# Altium PCB CAR_BOARD_2024-07-15.pcbdoc (part 2 of 2)
Units mil, origin at the board's own origin, x right, y up, seen from the top; angles counter-clockwise.
Board outline 4100 x 4517.05 mil, 2 copper layers (Top Layer, Bottom Layer); 71 components, 75 nets, 312 pads, 373 vias.
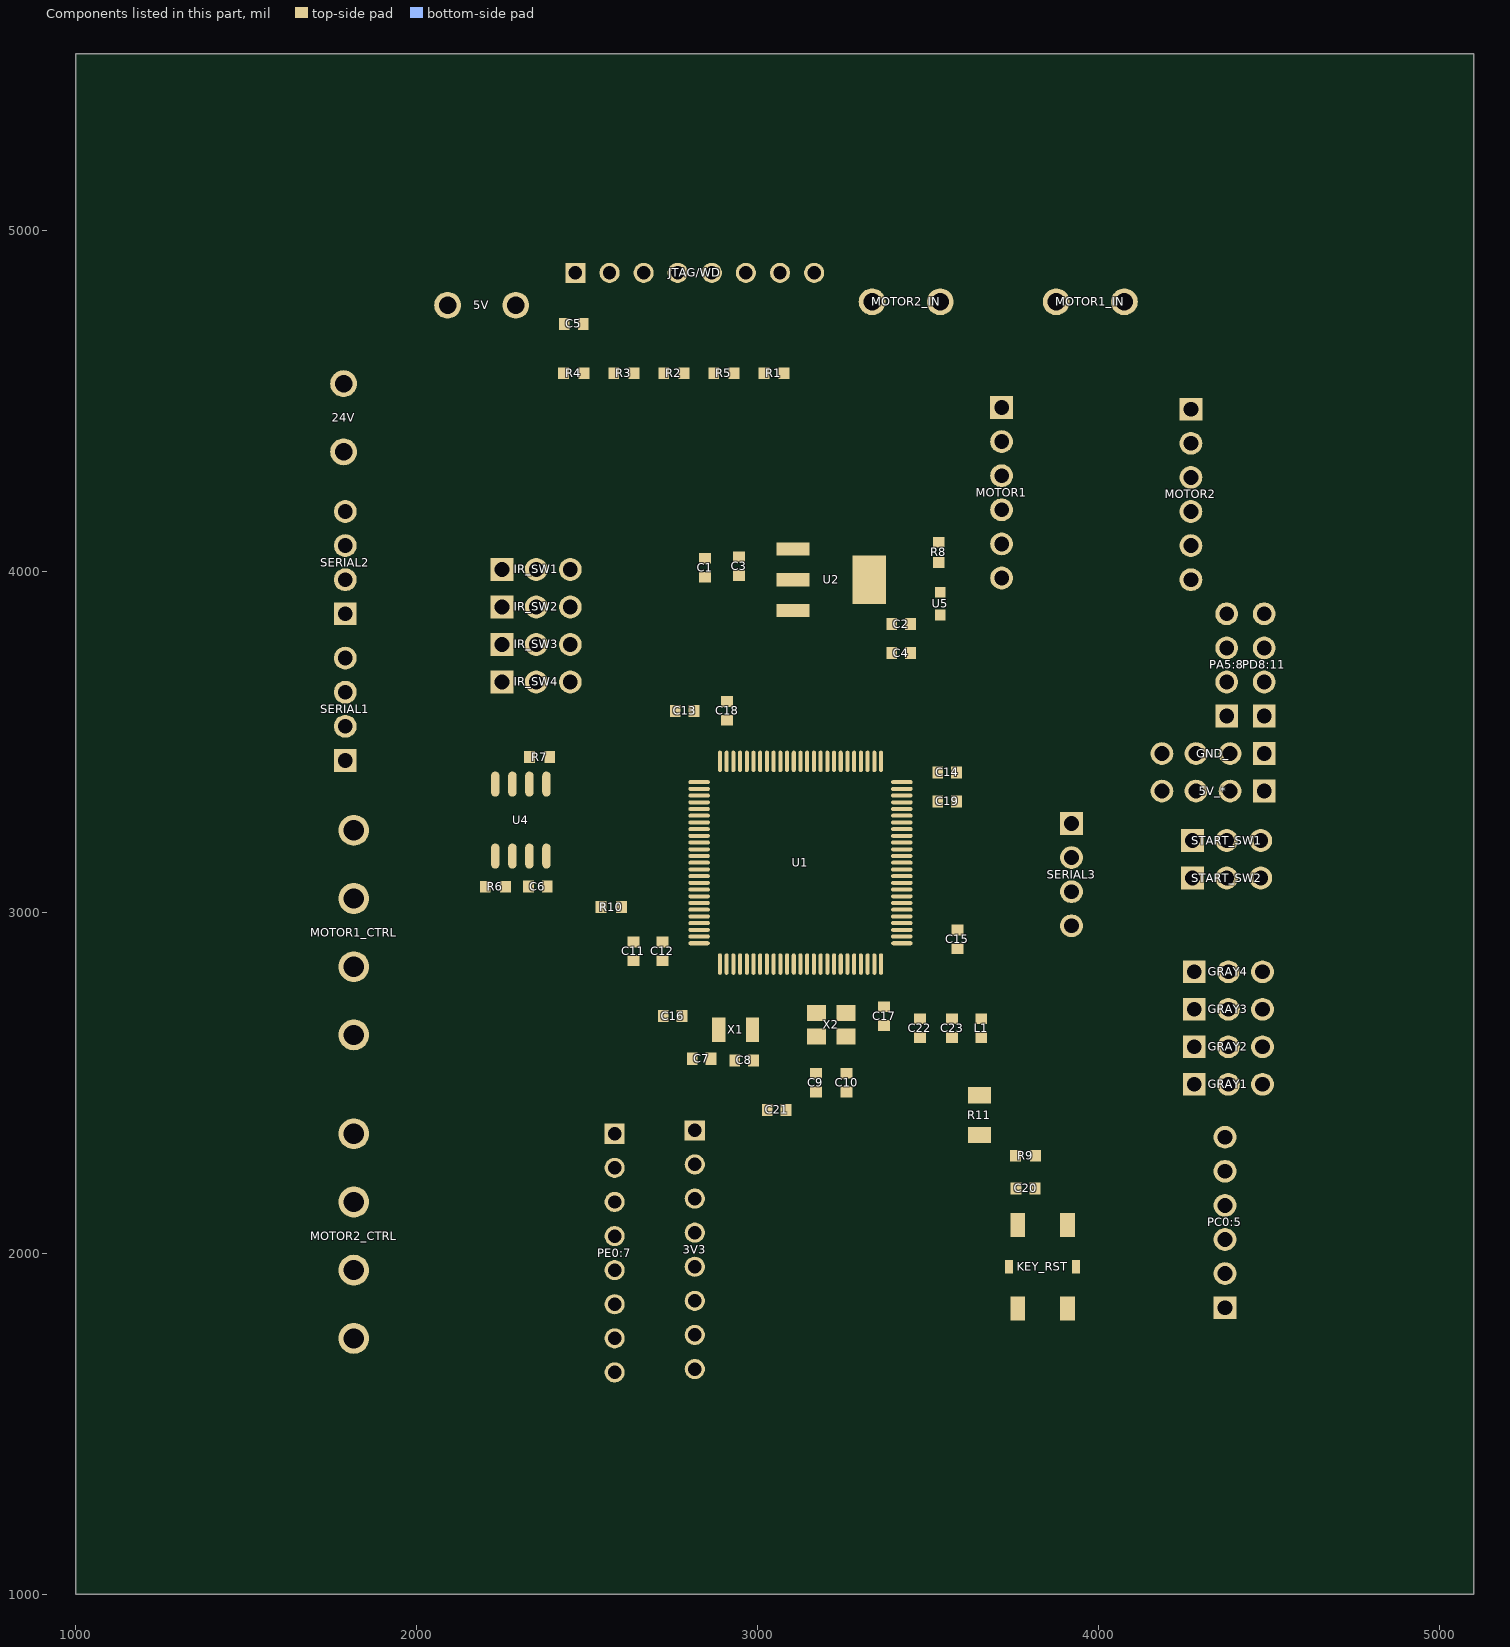
[diagram p2: the components of this part, seen from the top]

## Other copper
Top Layer:
  region net SPI1_MOSI: 2392.4,3367.62 2392.4,3358.87 2397.65,3355.52 2397.65,3360.47
  region net U4_6: 2334.48,3411.49 2325.73,3411.57 2328.4,3416.79 2331.9,3416.76
  region net VCC: 2292.4,3351.3 2267.6,3351.3 2275,3336.3 2285,3336.3
  region net VCC: 2241.69,3347.17 2218.31,3355.44 2220,3338.93 2230,3335.39
  region net VCC: 2342.4,3188.7 2317.6,3188.7 2325,3203.7 2335,3203.7
  region net VCC: 2342.21,3137.93 2317.79,3142.23 2322.4,3126.19 2332.4,3124.43
  region net PB4/TRST: 2284.38,3200.31 2275.62,3200.31 2278.25,3205.56 2281.75,3205.56
  region net FLASH_CS: 2242.4,3140.08 2217.6,3140.08 2225,3125.08 2235,3125.08
  region net PE2: 2882.87,2837.44 2882.87,2846.19 2877.62,2839.04 2877.62,2834.09
  region net PE3: 2912.86,2877.3 2904.11,2877.34 2906.75,2881.25 2910.25,2881.24
  region net PE4: 2932.5,2877.34 2923.75,2877.3 2926.35,2882.56 2929.85,2882.58
  region net PE5: 2952.19,2877.34 2943.44,2877.3 2946.05,2882.56 2949.55,2882.58
  region net PE6: 2973.17,2875.08 2965.25,2878.81 2969.77,2882.48 2973.13,2880.9
  region net VCC: 2993.11,2822.17 2981.3,2822.17 2982.2,2807.74 2992.2,2807.74
  region net OSC32_N: 3030.96,2818.22 3022.21,2818.19 3024.85,2812.95 3028.35,2812.96
  region net OSC32_P: 3050.65,2818.22 3041.9,2818.19 3044.55,2812.95 3048.05,2812.96
  region net VCC: 3091.54,2822.16 3079.72,2822.18 3080.6,2807.18 3090.6,2807.16
  region net OSC_N: 3110.97,2820.43 3103.04,2816.73 3107.54,2813.03 3110.91,2814.61
  region net OSC_P: 3130.65,2820.44 3122.72,2816.72 3127.23,2813.04 3130.6,2814.62
  region net RST: 3149.07,2877.32 3140.32,2877.32 3142.95,2882.57 3146.45,2882.57
  region net RST: 3150.34,2820.45 3142.43,2816.72 3146.94,2813.04 3150.31,2814.63
  region net PC0: 3168.76,2877.31 3160.01,2877.33 3162.65,2882.58 3166.15,2882.56
  region net PC1: 3188.82,2876.85 3180.11,2877.75 3183.25,2882.7 3186.75,2882.34
  region net PC2: 3208.1,2877.34 3199.35,2877.3 3201.95,2882.56 3205.45,2882.58
  region net PC3: 3227.79,2877.33 3219.04,2877.31 3221.65,2882.56 3225.15,2882.58
  region net VCC: 3249.02,2822.17 3237.2,2822.18 3238.1,2807.85 3248.1,2807.84
  region net GNDA: 3268.7,2873.35 3256.89,2873.35 3257.8,2888.35 3267.8,2888.35
  region net VDDA: 3288.39,2860.24 3288.39,2835.24 3302.2,2842.74 3302.2,2852.74
  region net VDDA: 3296.26,2835.24 3296.26,2860.24 3282.5,2852.74 3282.5,2842.74
  region net VDDA: 3308.07,2873.34 3296.26,2873.37 3297.2,2887.86 3307.2,2887.83
  region net GRAY1: 3345.9,2818.19 3337.15,2818.22 3339.75,2812.96 3343.25,2812.95
  region net GRAY2: 3367.13,2846.29 3367.13,2837.54 3372.38,2834.19 3372.38,2839.14
  region net GRAY3: 3432.54,2902.88 3423.79,2902.88 3430.94,2897.63 3435.89,2897.63
  region net VCC: 3448.07,2954.05 3447.59,2942.25 3462.62,2942.54 3463.02,2952.54
  region net GRAY4: 3451.8,2963.46 3451.79,2972.21 3457.05,2969.59 3457.05,2966.09
  region net PA5: 3451.81,2983.16 3451.79,2991.91 3457.05,2989.29 3457.05,2985.79
  region net PA6: 3451.82,3002.85 3451.78,3011.6 3457.04,3008.99 3457.06,3005.49
  region net PA7: 3451.82,3031.25 3451.77,3022.5 3457.04,3025.09 3457.06,3028.59
  region net PC4: 3451.81,3050.93 3451.78,3042.18 3457.04,3044.79 3457.05,3048.29
  region net PC5: 3451.81,3070.63 3451.79,3061.88 3457.05,3064.49 3457.05,3067.99
  region net FLASH_CS: 3392.81,3081.46 3392.56,3090.2 3387.39,3087.43 3387.49,3083.93
  region net PE7: 3392.7,3149.4 3392.67,3140.65 3387.43,3143.29 3387.44,3146.79
  region net MOTOR1_PWM: 3393.01,3189.03 3392.38,3180.3 3387.33,3183.29 3387.59,3186.79
  region net MOTOR2_PWM: 3393.34,3218.85 3392.11,3227.52 3387.28,3224.19 3387.78,3220.69
  region net OPI_TX: 3451.81,3326.53 3451.78,3317.78 3457.04,3320.39 3457.05,3323.89
  region net OPI_RX: 3451.8,3337.48 3451.79,3346.23 3457.05,3343.59 3457.05,3340.09
  region net U1_49: 3447.83,3355.64 3447.83,3367.45 3462.83,3366.54 3462.83,3356.54
  region net VCC: 3447.84,3375.32 3447.82,3387.13 3462.82,3386.24 3462.84,3376.24
  region net START_SW1: 3367.13,3452.54 3367.13,3443.79 3372.38,3450.94 3372.38,3455.89
  region net START_SW2: 3345.9,3471.82 3337.15,3471.78 3339.75,3477.04 3343.25,3477.06
  region net PD8: 3286.86,3471.79 3278.11,3471.81 3280.75,3477.05 3284.25,3477.05
  region net PD9: 3267.17,3471.8 3258.42,3471.8 3261.05,3477.05 3264.55,3477.05
  region net PD10: 3247.48,3471.8 3238.73,3471.8 3241.35,3477.05 3244.85,3477.05
  region net PD11: 3227.79,3471.81 3219.04,3471.79 3221.65,3477.04 3225.15,3477.06
  region net M2_ENCODER_A: 3208.62,3471.16 3199.95,3472.36 3203.25,3477.2 3206.75,3476.72
  region net M2_ENCODER_B: 3188.45,3471.78 3179.7,3471.82 3182.35,3477.06 3185.85,3477.04
  region net M1_ENCODER_A: 3129.38,3471.8 3120.62,3471.8 3123.25,3477.05 3126.75,3477.05
  region net M1_ENCODER_B: 3109.69,3471.81 3100.94,3471.79 3103.55,3477.05 3107.05,3477.05
  region net PA8: 3052.02,3469.13 3044.41,3473.44 3049.23,3476.75 3052.39,3474.96
  region net IR_SW1: 3030.96,3471.79 3022.21,3471.81 3024.85,3477.06 3028.35,3477.04
  region net IR_SW2: 3011.27,3471.8 3002.52,3471.8 3005.15,3477.05 3008.65,3477.05
  region net IR_SW3: 2991.58,3471.8 2982.83,3471.8 2985.45,3477.05 2988.95,3477.05
  region net IR_SW4: 2971.89,3471.81 2963.14,3471.79 2965.75,3477.05 2969.25,3477.05
  region net PA13/TMS: 2952.19,3471.82 2943.44,3471.78 2946.05,3477.04 2949.55,3477.06
  region net U1_73: 2934.05,3467.85 2922.24,3467.81 2923.1,3482.82 2933.1,3482.85
  region net VCC: 2882.87,3435.67 2882.87,3460.67 2867.87,3470.24 2867.87,3456.1
  region net PA14/TCK: 2798.21,3385.61 2798.19,3376.86 2792.95,3379.49 2792.96,3382.99
  region net PA15/TDI: 2798.2,3357.17 2798.2,3365.92 2792.95,3363.29 2792.95,3359.79
  region net TEST_TX: 2798.23,3306.88 2798.17,3298.13 2792.94,3300.79 2792.96,3304.29
  region net TEST_RX: 2798.21,3239.05 2798.2,3247.8 2792.95,3245.19 2792.95,3241.69
  region net TOF_TX: 2798.23,3188.78 2798.17,3180.03 2792.94,3182.69 2792.96,3186.19
  region net TOF_RX: 2798.22,3169.09 2798.18,3160.34 2792.94,3162.99 2792.96,3166.49
  region net PB3/TDO: 2798.32,3129.8 2798.09,3121.05 2792.91,3123.82 2793,3127.32
  region net PB4/TRST: 2798.27,3101.2 2798.13,3109.94 2792.92,3107.24 2792.98,3103.74
  region net SPI1_MOSI: 2799.08,3090.98 2797.46,3082.38 2792.78,3085.89 2793.44,3089.39
  region net MOTOR1_DIR1: 2798.24,3070.67 2798.16,3061.92 2792.94,3064.59 2792.97,3068.09
  region net MOTOR1_DIR2: 2798.23,3050.98 2798.17,3042.23 2792.94,3044.89 2792.96,3048.39
  region net U1_94: 2799.16,3021.81 2797.4,3030.38 2792.78,3026.79 2793.5,3023.29
  region net MOTOR2_DIR1: 2798.22,3011.6 2798.18,3002.85 2792.94,3005.49 2792.96,3008.99
  region net MOTOR2_DIR2: 2798.21,2991.91 2798.19,2983.16 2792.95,2985.79 2792.95,2989.29
  region net PE0: 2798.21,2963.45 2798.2,2972.2 2792.95,2969.59 2792.95,2966.09
  region net PE1: 2798.21,2943.77 2798.2,2952.52 2792.95,2949.89 2792.95,2946.39
  region net VCC: 2834.42,2902.88 2809.42,2902.88 2799.82,2887.88 2813.97,2887.88
  region net VCC: 3319.57,4045.87 3375.23,4045.87 3406,4083.37 3370.65,4083.37
  region net VCC: 3277.99,3943.79 3277.99,4006.29 3240.49,3987.54 3240.49,3962.54
  region net VCC: 3375.23,3957.59 3375.23,3904.13 3383.56,3900.31 3392.4,3926.83
  region net +5V: 3054.77,3865.16 3063.15,3903.74 3030.88,3931.84 3024.57,3902.8
  region net VCC: 3152.01,3955.71 3152.01,3994.29 3189.51,3987.54 3189.51,3962.54
  region net FLASH_CS: 2200.95,3092.01 2216.22,3072.21 2221.75,3089.6 2215.58,3097.59
  region net VCC: 2275.53,3087.54 2275.53,3062.54 2290.53,3070.04 2290.53,3080.04
  region net PA14/TCK: 2918.38,4562.99 2914.3,4570.73 2911.97,4563.9 2913.68,4560.66
  region net PA14/TCK: 2925.83,4597.01 2934.58,4597.01 2931.95,4602.26 2928.45,4602.26
  region net PB4/TRST: 2477.95,4562.99 2473.78,4570.68 2471.48,4563.91 2473.23,4560.7
  region net PB4/TRST: 2502.49,4597.01 2505.53,4588.81 2508.37,4596.24 2507.03,4599.85
  region net PA15/TDI: 2630.62,4562.99 2639.38,4562.99 2636.75,4557.74 2633.25,4557.74
  region net PA15/TDI: 2649.22,4597.01 2652.37,4588.85 2655.15,4596.22 2653.77,4599.79
  region net PA13/TMS: 2767.46,4588.82 2770.54,4597.01 2765.99,4599.83 2764.64,4596.23
  region net PA13/TMS: 2785.62,4562.99 2794.38,4562.99 2791.75,4557.74 2788.25,4557.74
  region net PB3/TDO: 3065.17,4562.99 3061.13,4570.75 3058.78,4563.9 3060.48,4560.64
  region net PB3/TDO: 3081.38,4597.01 3072.63,4597.01 3075.25,4602.26 3078.75,4602.26
  region net VCC: 3376.69,3777.72 3408.19,3777.72 3404.9,3815.22 3379.9,3815.22
  region net VCC: 3408.19,3742.28 3376.69,3742.28 3377.5,3704.78 3402.5,3704.78
  region net +5V: 2962.71,4058.31 2962.71,4026.81 2982.4,4030.04 2982.4,4055.04
  region net VCC: 3376.69,3862.72 3408.19,3862.72 3404.9,3900.22 3379.9,3900.22
  region net VCC: 3408.19,3827.28 3376.69,3827.28 3379.9,3789.78 3404.9,3789.78
  region net +5V: 2827.29,4021.81 2827.29,4053.31 2817.4,4050.04 2817.4,4025.04
  region net +5V: 2862.71,4053.31 2862.71,4021.81 2900.21,4025.04 2900.21,4050.04
  region net U5_1: 3521.25,3954.25 3538.75,3954.25 3533.5,3964.75 3526.5,3964.75
  region net U5_1: 3521.25,4009.47 3538.75,4009.47 3533.5,3998.97 3526.5,3998.97
  region net VCC: 3512.99,4068.78 3512.99,4100.53 3475.49,4097.14 3475.49,4072.14
  region net U4_6: 2325.86,3437.99 2334.61,3437.99 2331.96,3432.74 2328.46,3432.74
  region net PB3/TDO: 2405.53,3446.27 2402.71,3437.99 2407.24,3435.02 2408.5,3438.71
  region net VCC: 2314.9,3092.72 2339.9,3092.72 2332.4,3107.72 2322.4,3107.72
  region net VCC: 2311.69,3062.54 2311.69,3087.54 2296.69,3080.04 2296.69,3070.04
  region net OSC_P: 3242.29,2542.28 3250.97,2543.31 3242.44,2547.58 3238.01,2547.06
  region net OSC_N: 3167.32,2543.31 3176.07,2543.31 3173.45,2548.56 3169.95,2548.56
  region net U1_94: 2615.53,3020.67 2615.53,3029.42 2620.78,3026.79 2620.78,3023.29
  region net RST: 3750.92,2267.99 3759.67,2267.99 3757.05,2262.74 3753.55,2262.74
  region net VCC: 3798.78,2302.01 3830.53,2302.01 3824.92,2332.01 3804.92,2332.01
  region net PD8: 4457.62,3541.53 4451.53,3547.82 4449.68,3542.19 4452.11,3539.68
  region net VDDA: 3637.99,2675.14 3637.99,2700.14 3622.99,2692.64 3622.99,2682.64
  region net VCC: 3672,2648.19 3672,2616.69 3702,2619.14 3702,2639.14
  region net RST: 3766.58,2046.61 3757.83,2046.61 3760.45,2041.36 3763.95,2041.36
  region net RST: 3753.03,2117.48 3761.78,2117.48 3759.15,2122.73 3755.65,2122.73
  region net RST: 3757.83,1873.39 3766.58,1873.39 3763.95,1878.64 3760.45,1878.64
  region net GNDA: 3552.29,2619.94 3552.29,2644.94 3537.29,2637.44 3537.29,2627.44
  region net GNDA: 3587.71,2629 3565.95,2616.69 3585.09,2610.28 3594.13,2615.39
  region net VDDA: 3587.71,2700.14 3587.71,2675.14 3602.71,2682.64 3602.71,2692.64
  region net VDDA: 3552.29,2675.04 3552.29,2700.04 3537.29,2692.54 3537.29,2682.54
  region net GNDA: 3492.71,2644.94 3492.71,2619.94 3507.71,2627.44 3507.71,2637.44
  region net VDDA: 3492.71,2700.04 3492.71,2675.04 3507.71,2682.54 3507.71,2692.54
  region net VCC: 3073.1,2437.72 3098.1,2437.72 3090.6,2452.72 3080.6,2452.72
  region net VCC: 3098.31,2402.28 3066.81,2402.28 3075,2372.28 3095,2372.28
  region net RST: 3761.78,2172.28 3753.03,2172.28 3755.65,2167.03 3759.15,2167.03
  region net RST: 3750.92,2207.72 3759.67,2207.72 3757.05,2212.97 3753.55,2212.97
  region net U1_49: 3511.69,3330.89 3533.72,3342.72 3514.3,3349.31 3505.1,3344.37
  region net U1_73: 2927.71,3558.99 2905.95,3546.69 2923.58,3541.79 2931.64,3547.88
  region net VCC: 3387.71,2738.31 3387.71,2717.54 3402.71,2725.04 3402.71,2735.04
  region net VCC: 3352.29,2726.25 3374.19,2738.31 3354.9,2744.81 3345.78,2739.79
  region net VCC: 2793.31,2707.54 2793.31,2682.54 2800,2690.04 2800,2700.04
  region net VCC: 2793.31,2677.28 2761.81,2677.28 2765.1,2672.54 2790.1,2672.54
  region net VCC: 3567.29,2935.04 3567.29,2960.04 3552.29,2952.54 3552.29,2942.54
  region net VCC: 3568.76,2963.31 3602.71,2931.81 3615.22,2961.13 3600.55,2974.74
  region net VCC: 3527.66,3392.28 3511.69,3411.52 3506.26,3394.58 3512.68,3386.85
  region net VCC: 3511.69,3427.72 3543.19,3427.72 3537.5,3455.04 3512.5,3455.04
  region net VCC: 2822.5,3572.28 2797.5,3572.28 2805,3557.28 2815,3557.28
  region net VCC: 2737.71,2869.94 2737.71,2844.94 2752.71,2852.44 2752.71,2862.44
  region net VCC: 2702.29,2844.94 2702.29,2869.94 2687.29,2862.44 2687.29,2852.44
  region net VCC: 2617.29,2841.69 2617.29,2873.19 2587.29,2867.44 2587.29,2847.44
  region net VCC: 2652.71,2869.94 2652.71,2844.94 2667.71,2852.44 2667.71,2862.44
  region net VCC: 2840,2330.47 2790,2330.47 2805,2300.47 2825,2300.47
  region net VCC: 2785.47,2345.44 2829.77,2389.53 2789.93,2402.79 2772.22,2385.15
  region net GNDA: 3683.49,2439.45 3661.29,2439.45 3681.72,2424.45 3695.86,2424.45
  region net GNDA: 3637.5,2486.99 3662.5,2486.99 3655,2501.99 3645,2501.99
  region net OSC_P: 3230.75,2714.92 3230.75,2723.67 3225.5,2727.02 3225.5,2722.07
  region net OSC_P: 3239.1,2680.87 3230.75,2680.87 3227,2675.62 3231.95,2675.62
  region net OSC_N: 3190.99,2659.21 3199.25,2659.21 3203.09,2664.46 3198.14,2664.46
  region net OSC_N: 3176.07,2611.97 3167.32,2611.97 3169.95,2606.72 3173.45,2606.72
  region net OSC32_N: 2895.62,2690.43 2904.38,2690.43 2901.75,2695.68 2898.25,2695.68
  region net OSC32_N: 2890.18,2619.57 2881.43,2619.57 2884.05,2614.32 2887.55,2614.32
  region net OSC32_P: 2965.23,2690.43 2973.98,2690.43 2966.83,2695.68 2961.88,2695.68
  region net OSC32_P: 2988.57,2619.57 2979.82,2619.57 2982.45,2619.24 2985.95,2619.24
  region net OSC32_P: 2940.87,2582.72 2948.19,2577.92 2950.27,2582.83 2947.28,2584.79
  region net OSC32_N: 2877.31,2587.72 2878.31,2579.02 2882.61,2587.58 2882.1,2592.02
  region net RST: 2747.18,4279.24 2734.24,4292.19 2745.51,4292.99 2747.99,4290.51
  region net RST: 3170.74,3107.82 3157.82,3120.79 3157,3109.51 3159.47,3107.03
  region net PE7: 3055.85,3048.08 3074.15,3048.08 3066.75,3055.04 3063.25,3055.04
  region net PC5: 3495.76,3082.82 3482.82,3095.77 3482.01,3084.49 3484.49,3082.02
  region net PC4: 3474.01,3039.37 3470.2,3057.27 3463.38,3048.29 3464.12,3044.79
  region net PC3: 3295.74,3017.82 3282.82,3030.79 3282,3019.51 3284.47,3017.03
  region net PC2: 3240.74,2992.82 3227.82,3005.79 3227,2994.51 3229.47,2992.03
  region net PC1: 3175.85,2971.93 3194.15,2971.93 3186.75,2963.39 3183.25,2963.39
  region net PC0: 3153.31,2939.8 3170.96,2944.64 3166.15,2934.46 3162.65,2933.5
  region net PE6: 3040.76,2937.82 3027.82,2950.77 3027.01,2939.5 3029.48,2937.02
  region net PE5: 3000.74,2937.82 2987.82,2950.79 2987,2939.51 2989.47,2937.03
  region net PE4: 2960.74,2937.82 2947.82,2950.79 2947,2939.51 2949.47,2937.03
  region net RST: 3764.3,2277.1 3745.99,2276.77 3753.55,2268.36 3757.05,2268.42
  region net RST: 3191.95,2804.18 3191.91,2785.87 3183.38,2793.29 3183.39,2796.79
  region net VCC: 3075.85,2368.08 3094.15,2368.08 3095,2376.62 3075,2376.62
  region net PE1: 2458.09,2850.87 2458.05,2869.18 2466.61,2861.79 2466.62,2858.29
  region net PE0: 2492.18,2889.26 2479.22,2902.18 2490.49,2903.01 2492.97,2900.54
  region net PB3/TDO: 2401.88,3455.79 2388.96,3442.82 2400.23,3442.03 2402.7,3444.51
  region net PB3/TDO: 2617.18,4354.26 2604.22,4367.18 2615.49,4368.01 2617.97,4365.54
  region net PA13/TMS: 2780.85,4533.08 2799.15,4533.08 2791.75,4541.62 2788.25,4541.62
  region net PA13/TMS: 2720.47,3783.73 2714.92,3801.17 2725.28,3796.79 2726.39,3793.29
  region net PA14/TCK: 2747.18,3405.79 2734.26,3392.82 2745.53,3392.03 2748,3394.51
  region net PA14/TCK: 2682.18,4454.26 2669.22,4467.18 2680.49,4468.01 2682.97,4465.54
  region net PA15/TDI: 2738.89,3351.64 2737.19,3369.87 2746.38,3363.29 2746.71,3359.79
  region net PA15/TDI: 2625.85,4423.08 2644.15,4423.08 2636.75,4431.62 2633.25,4431.62
  region net PB4/TRST: 2140.85,3536.93 2159.15,3536.93 2151.75,3528.39 2148.25,3528.39
  region net PB4/TRST: 2222.18,4299.26 2209.22,4312.18 2220.49,4313.01 2222.97,4310.54
  region net FLASH_CS: 2220.85,3156.33 2239.15,3156.33 2235,3147.79 2225,3147.79
  region net FLASH_CS: 3307.18,3074.26 3294.21,3087.18 3303.76,3086.28 3306.24,3083.81
  region net MOTOR1_PWM: 3343.09,3175.87 3343.05,3194.18 3351.61,3186.79 3351.62,3183.29
  region net OPI_TX: 3735.76,3297.82 3722.82,3310.77 3722.01,3299.5 3724.48,3297.02
  region net OPI_RX: 3725.75,3337.82 3712.82,3350.78 3712,3339.5 3714.48,3337.03
  region net PA6: 3930.49,3413.66 3924.31,3430.9 3918.7,3421.22 3920.01,3417.58
  region net GNDA: 3483.07,2623.29 3483.07,2641.6 3491.62,2637.44 3491.62,2627.44
  region net GNDA: 3275.74,2907.82 3262.82,2920.79 3259.7,2911.82 3266.76,2904.73
  region net VDDA: 3484.34,2697.86 3481.63,2679.76 3490.68,2682.54 3492.18,2692.54
  region net VDDA: 3341.95,2919.18 3341.91,2900.87 3333.37,2905.04 3333.4,2915.04
  region net PA5: 3961.95,3404.18 3961.91,3385.87 3953.38,3393.29 3953.39,3396.79
  region net PA7: 3910.75,3437.82 3897.82,3450.79 3897,3439.51 3899.47,3437.03
  region net PA8: 3733.57,3694.23 3720.63,3707.19 3731.91,3707.98 3734.39,3705.51
  region net PA8: 3530.74,3682.82 3517.82,3695.79 3517,3684.51 3519.47,3682.03
  region net PB4/TRST: 2270.85,3173.08 2289.15,3173.08 2281.75,3181.62 2278.25,3181.62
  region net PB4/TRST: 2697.18,3115.79 2684.26,3102.82 2693.76,3103.8 2696.24,3106.28
  region net VCC: 3824.12,2341.89 3805.81,2341.97 3804.92,2333.43 3824.92,2333.34
  region net VCC: 3696.94,2638.29 3696.92,2619.98 3688.37,2619.14 3688.4,2639.14
  region net VCC: 3696.95,2739.18 3696.91,2720.87 3688.37,2725.04 3688.4,2735.04
  region net VCC: 2556.31,2845.41 2548.14,2861.8 2555.18,2866.83 2564.57,2848
  region net VCC: 3675.74,3022.82 3662.82,3035.79 3656.17,3030.36 3670.29,3016.19
  region net RST: 3063.15,4845.53 3094.47,4876.85 3094.66,4847.82 3092.19,4845.34
  region net PB3/TDO: 2963.16,4845.53 2994.47,4876.86 2994.67,4847.82 2992.2,4845.35
  region net PA14/TCK: 2863.17,4845.53 2894.47,4876.87 2894.68,4847.84 2892.21,4845.36
  region net PA13/TMS: 2780.5,4849.87 2738.13,4862.76 2751.55,4837.08 2755.05,4836.01
  region net PA15/TDI: 2687.15,4855.47 2642.85,4855.47 2663.25,4834.8 2666.75,4834.8
  region net PB4/TRST: 2587.15,4855.47 2542.85,4855.47 2563.25,4834.8 2566.75,4834.8
  region net IR_SW4: 2347.88,3708.4 2383.4,3672.93 2383.43,3706 2380.96,3708.48
  region net IR_SW3: 2347.88,3818.4 2383.4,3782.93 2383.43,3816 2380.96,3818.48
  region net IR_SW2: 2347.92,3861.6 2383.4,3897.12 2383.47,3864.05 2381,3861.57
  region net IR_SW1: 2347.92,3971.6 2383.4,4007.12 2383.47,3974.05 2381,3971.57
  region net GNDA: 4505.1,2802.87 4454.9,2802.87 4475,2779.44 4485,2779.44
  region net GRAY4: 4346.6,2822.93 4382.12,2858.4 4349.04,2858.48 4346.57,2856
  region net GNDA: 4505.1,2692.87 4454.9,2692.87 4475,2669.44 4485,2669.44
  region net GNDA: 4505.1,2737.14 4454.9,2737.14 4475,2760.56 4485,2760.56
  region net GRAY3: 4389.83,2746.99 4347.03,2720.76 4354.66,2752.91 4357.73,2754.79
  region net GNDA: 4505.1,2582.87 4454.9,2582.87 4475,2559.44 4485,2559.44
  region net GNDA: 4505.1,2627.14 4454.9,2627.14 4475,2650.56 4485,2650.56
  region net GRAY2: 4346.6,2602.93 4382.12,2638.4 4349.04,2638.47 4346.56,2636
  region net GNDA: 4446.6,2497.12 4482.08,2461.6 4451.3,2459.27 4444.23,2466.35
  region net GNDA: 4505.1,2517.14 4454.9,2517.14 4475,2540.56 4485,2540.56
  region net GRAY1: 4385.22,2528.06 4346.55,2496.05 4349.59,2528.98 4352.3,2531.22
  region net TEST_TX: 1787.92,4041.6 1823.4,4077.12 1823.47,4044.05 1821,4041.57
  region net TEST_RX: 1812.16,3949.92 1812.11,4000.12 1835.56,3976.79 1835.56,3973.29
  region net TOF_TX: 1812.16,3619.92 1812.11,3670.12 1835.56,3646.79 1835.56,3643.29
  region net TOF_RX: 1787.88,3578.4 1823.4,3542.93 1823.43,3576 1820.96,3578.48
  region net M2_ENCODER_B: 4295.1,3952.87 4244.9,3952.87 4268.25,3930.04 4271.75,3930.04
  region net M2_ENCODER_A: 4267.92,4041.6 4303.4,4077.12 4303.47,4044.05 4301,4041.57
  region net M1_ENCODER_B: 3740.1,3957.87 3689.9,3957.87 3713.25,3934.44 3716.75,3934.44
  region net M1_ENCODER_A: 3712.92,4046.6 3748.4,4082.12 3748.47,4049.05 3746,4046.57
  region net PE3: 2550.53,2048.18 2581.87,2079.47 2552.83,2079.69 2550.36,2077.21
  region net PE2: 2550.53,2148.18 2581.87,2179.47 2552.83,2179.69 2550.36,2177.21
  region net PD11: 4451.6,3877.12 4487.08,3841.6 4454,3841.57 4451.53,3844.05
  region net PD10: 4451.6,3777.12 4487.08,3741.6 4454,3741.57 4451.53,3744.05
  region net PD9: 4492.23,3642.33 4451.68,3671.91 4456.72,3639.24 4459.58,3637.15
  region net PA8: 4400.1,3897.14 4349.9,3897.14 4373.25,3920.56 4376.75,3920.56
  region net MOTOR2_DIR2: 1811.5,1995.14 1770.65,1940.89 1764.7,1985.67 1766.82,1988.49
  region net MOTOR2_DIR1: 1860.19,2152.86 1812.18,2104.82 1857.37,2105.2 1859.84,2107.68
  region net MOTOR2_PWM: 1860.19,2347.19 1812.14,2395.19 1857.33,2394.85 1859.8,2392.37
  region net MOTOR1_DIR2: 1859.03,2829.46 1819.96,2885.01 1864.4,2876.92 1866.44,2874.01
  region net MOTOR1_DIR1: 1860.19,3042.86 1812.18,2994.82 1857.37,2995.2 1859.84,2997.68
  region net VCC: 2837.15,1679.53 2792.85,1679.53 2805,1700.2 2825,1700.2
  region net VCC: 2837.15,1779.53 2792.85,1779.53 2805,1800.2 2825,1800.2
  region net VCC: 2837.15,1740.47 2792.85,1740.47 2805,1719.8 2825,1719.8
  region net VCC: 2837.15,1879.53 2792.85,1879.53 2805,1900.2 2825,1900.2
  region net VCC: 2837.15,1840.47 2792.85,1840.47 2805,1819.8 2825,1819.8
  region net VCC: 2837.15,1940.47 2792.85,1940.47 2805,1919.8 2825,1919.8
  region net VCC: 2837.15,1979.53 2792.85,1979.53 2805,2000.2 2825,2000.2
  region net VCC: 2837.15,2040.47 2792.85,2040.47 2805,2019.8 2825,2019.8
  region net VCC: 2837.15,2079.53 2792.85,2079.53 2805,2100.2 2825,2100.2
  region net VCC: 2837.15,2140.47 2792.85,2140.47 2805,2119.8 2825,2119.8
  region net VCC: 2837.15,2179.53 2792.85,2179.53 2805,2200.2 2825,2200.2
  region net VCC: 2837.15,2240.47 2792.85,2240.47 2805,2219.8 2825,2219.8
  region net VCC: 2837.15,2279.53 2792.85,2279.53 2805,2300.2 2825,2300.2
  region net START_SW1: 4341.6,3097.93 4377.08,3133.44 4344,3133.48 4341.53,3131
  region net START_SW2: 4379.66,3243.18 4341.54,3210.52 4344.02,3243.5 4346.69,3245.78
Bottom Layer:
  region net VCC: 2456.9,4845.47 2435.47,4890.65 2425.45,4854.64 2437.07,4837.97
  region net 24V: 2218.75,3708.46 2281.25,3708.46 2262.5,3745.96 2237.5,3745.96
  region net 24V: 2281.25,3751.53 2218.75,3751.53 2237.5,3714.03 2262.5,3714.03
  region net 24V: 2218.75,3818.46 2281.25,3818.46 2262.5,3855.96 2237.5,3855.96
  region net 24V: 2281.25,3861.53 2218.75,3861.53 2237.5,3824.03 2262.5,3824.03
  region net 24V: 2218.75,3928.47 2281.25,3928.47 2262.5,3965.97 2237.5,3965.97
  region net 24V: 2281.25,3971.53 2218.75,3971.53 2237.5,3934.03 2262.5,3934.03
  region net +5V: 4311.25,2791.53 4248.75,2791.53 4267.5,2754.03 4292.5,2754.03
  region net +5V: 4306.25,2791.53 4246.53,2791.53 4262.5,2754.03 4287.5,2754.03
  region net +5V: 4246.53,2858.47 4306.25,2858.47 4287.5,2895.97 4262.5,2895.97
  region net +5V: 4311.25,2681.53 4248.75,2681.53 4267.5,2644.03 4292.5,2644.03
  region net +5V: 4248.75,2748.47 4311.25,2748.47 4292.5,2785.97 4267.5,2785.97
  region net +5V: 4311.25,2681.53 4248.75,2681.53 4267.5,2644.03 4292.5,2644.03
  region net +5V: 4246.53,2748.47 4306.25,2748.47 4287.5,2785.97 4262.5,2785.97
  region net +5V: 4311.25,2571.53 4248.75,2571.53 4267.5,2534.03 4292.5,2534.03
  region net +5V: 4248.75,2638.47 4311.25,2638.47 4292.5,2675.97 4267.5,2675.97
  region net +5V: 4311.25,2571.53 4248.75,2571.53 4267.5,2534.03 4292.5,2534.03
  region net +5V: 4248.75,2638.47 4311.25,2638.47 4292.5,2675.97 4267.5,2675.97
  region net +5V: 4248.75,2528.47 4311.25,2528.47 4292.5,2565.97 4267.5,2565.97
  region net +5V: 4248.75,2528.47 4311.25,2528.47 4292.5,2565.97 4267.5,2565.97
  region net +5V: 3905,3293.46 3953.47,3293.46 3940,3323.46 3920,3323.46
  region net +5V: 1802.5,3841.53 1777.5,3841.53 1785,3840.04 1795,3840.04
  region net +5V: 1756.54,3460.9 1774.32,3478.46 1758.35,3483.77 1751.23,3476.74
  region net +5V: 1823.46,3476.29 1823.46,3413.79 1860.96,3432.54 1860.96,3457.54
  region net MOTOR2_1: 4236.5,4508.44 4303.5,4508.44 4287.5,4560.94 4252.5,4560.94
  region net MOTOR1_1: 3681.53,4513.47 3748.47,4513.47 3722.5,4565.97 3687.5,4565.97
  region net PE0: 2550.47,2373.45 2556.76,2379.53 2551.13,2381.39 2548.62,2378.95
  region net PC0: 4336.53,1867.39 4342.83,1873.47 4337.19,1875.32 4334.68,1872.89
  region net PA5: 4341.53,3550.67 4341.53,3559.42 4336.28,3556.79 4336.28,3553.29
  region net +5V: 4451.53,3323.79 4451.53,3386.29 4414.03,3367.54 4414.03,3342.54
  region net VCC: 2844.53,2389.53 2844.53,2330.47 2882.03,2347.54 2882.03,2372.54
  region net +5V: 4243.75,3133.51 4306.25,3133.51 4287.5,3171.01 4262.5,3171.01
  region net +5V: 4243.75,3133.51 4306.25,3133.51 4287.5,3171.01 4262.5,3171.01
  region net +5V: 4306.25,3066.58 4243.75,3066.58 4262.5,3029.08 4287.5,3029.08
  region net +5V: 4243.75,3133.51 4306.25,3133.51 4287.5,3171.01 4262.5,3171.01
  region net +5V: 4306.25,3176.58 4243.75,3176.58 4262.5,3139.08 4287.5,3139.08
  region net +5V: 4243.75,3243.51 4306.25,3243.51 4287.5,3281.01 4262.5,3281.01
  region net +5V: 4306.25,3176.58 4243.75,3176.58 4262.5,3139.08 4287.5,3139.08
  region net +5V: 4306.25,3176.58 4243.75,3176.58 4262.5,3139.08 4287.5,3139.08
  region net RST: 2725.85,4271.93 2744.15,4271.93 2736.75,4263.39 2733.25,4263.39
  region net RST: 3170.76,3132.18 3157.82,3119.24 3157.01,3130.51 3159.49,3132.99
  region net PE7: 3055.85,3031.93 3074.15,3031.93 3066.75,3023.39 3063.25,3023.39
  region net PC5: 3507.18,3095.77 3494.23,3082.82 3505.51,3082.02 3507.99,3084.49
  region net PC4: 3488.08,3040.85 3488.07,3059.16 3496.62,3051.75 3496.62,3048.25
  region net PC3: 3305.44,3036.33 3299.97,3018.86 3310.31,3023.29 3311.41,3026.79
  region net PC2: 3248.07,2995.85 3248.07,3014.16 3256.62,3006.75 3256.62,3003.25
  region net PC1: 3193.07,2970.85 3193.07,2989.16 3201.62,2981.75 3201.62,2978.25
  region net PC0: 3168.09,2940.87 3168.05,2959.18 3176.61,2951.79 3176.62,2948.29
  region net PE6: 3040.76,2937.82 3027.82,2950.77 3027.01,2939.49 3029.49,2937.02
  region net PE5: 3000.76,2937.82 2987.82,2950.77 2987.01,2939.49 2989.49,2937.02
  region net PE4: 2960.76,2937.82 2947.82,2950.77 2947.01,2939.49 2949.49,2937.02
  region net RST: 3745.85,2293.08 3764.15,2293.08 3756.75,2301.62 3753.25,2301.62
  region net RST: 3208.08,2785.85 3208.07,2804.16 3216.62,2796.75 3216.62,2793.25
  region net PE1: 2440.85,2851.93 2459.15,2851.93 2451.75,2843.39 2448.25,2843.39
  region net PE0: 2470.85,2881.93 2489.15,2881.93 2481.75,2873.39 2478.25,2873.39
  region net PB3/TDO: 2397.78,3445.85 2397.77,3464.16 2406.32,3456.75 2406.32,3453.25
  region net PB3/TDO: 2595.85,4346.93 2614.15,4346.93 2606.75,4338.39 2603.25,4338.39
  region net PA13/TMS: 2790.76,4512.82 2777.82,4525.77 2777.01,4514.49 2779.49,4512.02
  region net PA13/TMS: 2716.3,3800.46 2698.84,3794.95 2703.25,3805.3 2706.75,3806.4
  region net PA14/TCK: 2735.76,3417.18 2722.82,3404.24 2722.01,3415.51 2724.49,3417.99
  region net PA14/TCK: 2660.85,4446.93 2679.15,4446.93 2671.75,4438.39 2668.25,4438.39
  region net PA15/TDI: 2731.56,3372.11 2717.8,3360.04 2717.73,3371.34 2720.36,3373.65
  region net PA15/TDI: 2625.85,4406.93 2644.15,4406.93 2636.75,4398.39 2633.25,4398.39
  region net PB4/TRST: 2162.18,3544.26 2149.22,3557.18 2160.49,3558.01 2162.97,3555.54
  region net PB4/TRST: 2212.45,4288.05 2197.83,4299.07 2198.25,4288.05 2201.75,4285.41
  region net VCC: 3023.07,4570.85 3023.07,4589.16 3031.62,4590 3031.62,4570
  region net VCC: 2733.29,4587.94 2714.99,4588.21 2714.27,4596.77 2734.27,4596.47
  region net VCC: 2568.02,4588.08 2586.33,4588.08 2587.18,4596.62 2567.18,4596.62
  region net VCC: 2434.27,4582.98 2415.96,4583.25 2415.24,4591.8 2435.24,4591.52
  region net VCC: 2438.86,4716.61 2420.56,4717.26 2419.41,4708.76 2439.4,4708.04
  region net VCC: 2420.85,4733.08 2439.15,4733.08 2440,4741.62 2420,4741.62
  region net VCC: 3390.76,4247.19 3377.82,4234.24 3371.18,4239.68 3385.32,4253.82
  region net FLASH_CS: 2242.18,3165.16 2229.23,3152.22 2240.51,3151.41 2242.98,3153.89
  region net FLASH_CS: 3286.93,3065.85 3286.93,3084.16 3278.38,3076.75 3278.38,3073.25
  region net MOTOR1_PWM: 3335.74,3172.82 3322.82,3185.79 3322,3174.51 3324.47,3172.03
  region net OPI_TX: 3743.08,3300.85 3743.07,3319.16 3751.62,3311.75 3751.62,3308.25
  region net OPI_RX: 3733.08,3340.85 3733.07,3359.16 3741.62,3351.75 3741.62,3348.25
  region net PA6: 3947.18,3424.24 3934.24,3437.18 3945.51,3437.99 3947.99,3435.51
  region net GNDA: 3475.76,2644.62 3462.82,2631.68 3459.71,2640.66 3466.78,2647.73
  region net GNDA: 3283.07,2910.85 3283.07,2929.16 3290,2925 3290,2915
  region net VDDA: 3465.85,2698.08 3484.15,2698.08 3480,2706.62 3470,2706.62
  region net VDDA: 3362.18,2910.77 3349.24,2897.82 3358.21,2894.72 3365.29,2901.79
  region net PA5: 3982.18,3394.26 3969.22,3407.18 3980.49,3408.01 3982.97,3405.54
  region net PA7: 3922.18,3449.24 3909.24,3462.18 3920.51,3462.99 3922.99,3460.51
  region net PA8: 3713.32,3685.85 3713.32,3704.16 3704.77,3696.75 3704.78,3693.25
  region net PA8: 3538.08,3685.85 3538.07,3704.16 3546.62,3696.75 3546.62,3693.25
  region net +5V: 2997.18,4039.24 2984.24,4052.18 2989.68,4058.82 3003.82,4044.68
  region net PB4/TRST: 2289.41,3172.78 2286.54,3154.7 2296.13,3160.65 2296.69,3164.15
  region net PB4/TRST: 2676.93,3105.85 2676.92,3124.16 2668.38,3116.75 2668.38,3113.25
  region net VCC: 3695.85,2738.08 3714.15,2738.08 3710,2746.62 3700,2746.62
  region net +5V: 3788.23,4163.38 3788.23,4181.69 3779.68,4182.53 3779.68,4162.53
  region net +5V: 3788.23,4163.38 3788.23,4181.69 3779.68,4182.53 3779.68,4162.53
  region net +5V: 3804.37,4163.38 3804.37,4181.69 3812.92,4182.53 3812.92,4162.53
  region net OPI_TX: 3886.6,3057.91 3922.09,3093.4 3889.02,3093.45 3886.54,3090.98
  region net OPI_RX: 3908.97,3191.6 3890.03,3145.11 3877.09,3175.43 3878.52,3178.95
  region net 24V: 1811.06,4520.5 1811.02,4579.55 1838.59,4562.54 1838.61,4537.54
  region net +5V: 2287.53,4740.71 2329.29,4782.47 2333.84,4753.84 2316.16,4736.16
  region net +5V: 4249.26,4148.74 4246.54,4198.86 4223.96,4182.53 4225.05,4162.53
  region net MOTOR2_2: 4247.95,4349.83 4247.78,4400.03 4224.38,4392.35 4224.5,4357.35
  region net +5V: 3740.95,4201.13 3732.72,4151.62 3758.28,4162.53 3761.61,4182.53
  region net +5V: 3697.28,4151.62 3689.05,4201.13 3668.39,4182.53 3671.72,4162.53
  region net +5V: 3740.95,4201.13 3732.72,4151.62 3758.28,4162.53 3761.61,4182.53
  region net MOTOR1_2: 3692.87,4405.11 3692.86,4354.91 3669.43,4362.52 3669.45,4397.52
  region net PE7: 2578.13,1679.47 2609.47,1648.17 2609.64,1677.21 2607.17,1679.69
  region net PE6: 2578.15,1779.47 2609.47,1748.15 2609.66,1777.19 2607.19,1779.67
  region net PE5: 2578.15,1879.47 2609.47,1848.15 2609.66,1877.19 2607.19,1879.67
  region net PE4: 2578.15,1979.47 2609.47,1948.15 2609.66,1977.19 2607.19,1979.67
  region net PE1: 2550.53,2248.18 2581.87,2279.47 2552.83,2279.69 2550.36,2277.21
  region net PC5: 4347.87,2314.91 4347.87,2365.1 4324.44,2341.75 4324.44,2338.25
  region net PC4: 4382.36,2271.1 4337.6,2248.38 4347.73,2279.79 4351.01,2281.46
  region net PC3: 4336.6,2137.93 4372.12,2173.4 4339.04,2173.48 4336.57,2171
  region net PC2: 4336.6,2037.91 4372.1,2073.4 4339.02,2073.46 4336.55,2070.98
  region net PC1: 4336.6,1937.91 4372.1,1973.4 4339.02,1973.46 4336.55,1970.98
  region net PA7: 4360.99,3744.61 4346.6,3792.7 4330.83,3763.69 4331.88,3760.19
  region net PA6: 4352.87,3649.91 4352.87,3700.1 4329.44,3676.75 4329.44,3673.25
  region net MOTOR1_2: 3361.06,4760.5 3361.02,4819.55 3388.59,4807.54 3388.61,4772.54
  region net MOTOR1_1: 3532.55,4750.71 3574.29,4792.49 3585.29,4764.5 3560.55,4739.74
  region net MOTOR2_2: 3901.06,4760.5 3901.02,4819.55 3928.59,4807.54 3928.61,4772.54
  region net MOTOR2_1: 4072.55,4750.71 4114.29,4792.49 4125.29,4764.5 4100.55,4739.74
  region net MOTOR1_PWM: 1844.97,3206.07 1844.93,3273.98 1876.64,3241.79 1876.64,3238.29
  region net +5V: 4162.87,3329.91 4162.87,3380.1 4139.44,3367.5 4139.44,3342.5
  region net +5V: 4207.13,3329.91 4207.13,3380.1 4230.56,3367.5 4230.56,3342.5
  region net +5V: 4262.87,3329.91 4262.87,3380.1 4239.44,3367.5 4239.44,3342.5
  region net +5V: 4307.13,3329.91 4307.13,3380.1 4330.56,3367.5 4330.56,3342.5
  region net +5V: 4304.63,3327.9 4255.66,3338.92 4262.5,3313.37 4287.5,3307.74
  region net +5V: 4407.16,3329.92 4407.11,3380.12 4430.55,3367.54 4430.57,3342.54
  region net +5V: 4362.87,3329.91 4362.87,3380.1 4339.44,3367.5 4339.44,3342.5

## Silkscreen, mask and mechanical layers (free items; w line width, h text height)
Top Overlay:
  text "3v3" at 2415,4750 h40
  text "TDI" at 2635,4750 h40
  text "TCK" at 2815,4750 h40
  text "RST" at 3030,4745 h40
  text "TMS" at 2720,4695 h40
  text "TRST" at 2525,4690 h40
  text "TDO" at 2920,4685 h40
  text "GND" at 3115,4675 h40
  text "-       +" at 2036.4,4540.05 h40 r4
  text "-    +" at 3891.74,4530.08 h40 r5
  text "-    +" at 3336.74,4525.08 h40 r5
  text "<-    +    ->" at 3780,4435 h40
  text "<-    -    ->" at 3780,4335 h40
  text "-       +" at 2049.95,4288.61 h40 r86
  text "<-   GND   ->" at 3775,4245 h40
  text "gnd" at 1858.13,4145.25 h40 r9
  text "<-   +5V   ->" at 3765,4130 h40
  text "TEST" at 1915,4110 h40 r270
  text "S" at 2340,4085 h40 r180
  text "GND" at 2405,4050 h40
  text "24V" at 2190,4045 h40
  text "tx" at 1855,4040 h40
  text "<-    A    ->" at 3775.7,4035.02 h40 r2
  text "rx" at 1865,3945 h40
  text "<-    B    ->" at 3780,3935 h40
  text "5V" at 1860,3845 h40
  text "gnd" at 1848.13,3710.25 h40 r9
  text "TOF" at 1920,3670 h40 r270
  text "tx" at 1860,3610 h40
  text "A5 D8->" at 4025,3540 h40
  text "rx" at 1865,3525 h40
  text "5V" at 1850,3410 h40
  text "pwm" at 2035,3290 h40 r270
  text "5V" at 3790,3215 h40
  text "rx" at 3800,3140 h40
  text "dir1" at 2020,3085 h40 r270
  text "OPI" at 3795,3085 h40 r90
  text "tx" at 3790,3030 h40
  text "S" at 4350,3020 h40 r180
  text "5V" at 4235,2980 h40
  text "GND" at 4415,2975 h40
  text "gnd" at 3773.13,2915.25 h40 r9
  text "S" at 4360,2910 h40 r180
  text "dir2" at 2020,2900 h40 r270
  text "5V" at 4245,2870 h40
  text "GND" at 4425,2865 h40
  text "gnd" at 2025.25,2686.87 h40 r279
  text "pwm" at 2035,2380 h40 r270
  text "PE0" at 2420,2320 h40
  text "dir1" at 2020,2175 h40 r270
  text "ICROBO" at 3030,2170 h80
  text "\"请输入队名\"" at 3020,2105 h80
  text "dir2" at 2020,1990 h40 r270
  text "Wheel fighting" at 2895,1960 h80
  text "robot" at 3090,1825 h80
  text "gnd" at 2025.25,1776.87 h40 r279